# EAGLE board front-panel-revD-DEB-board2 (EAGLE 5.11)
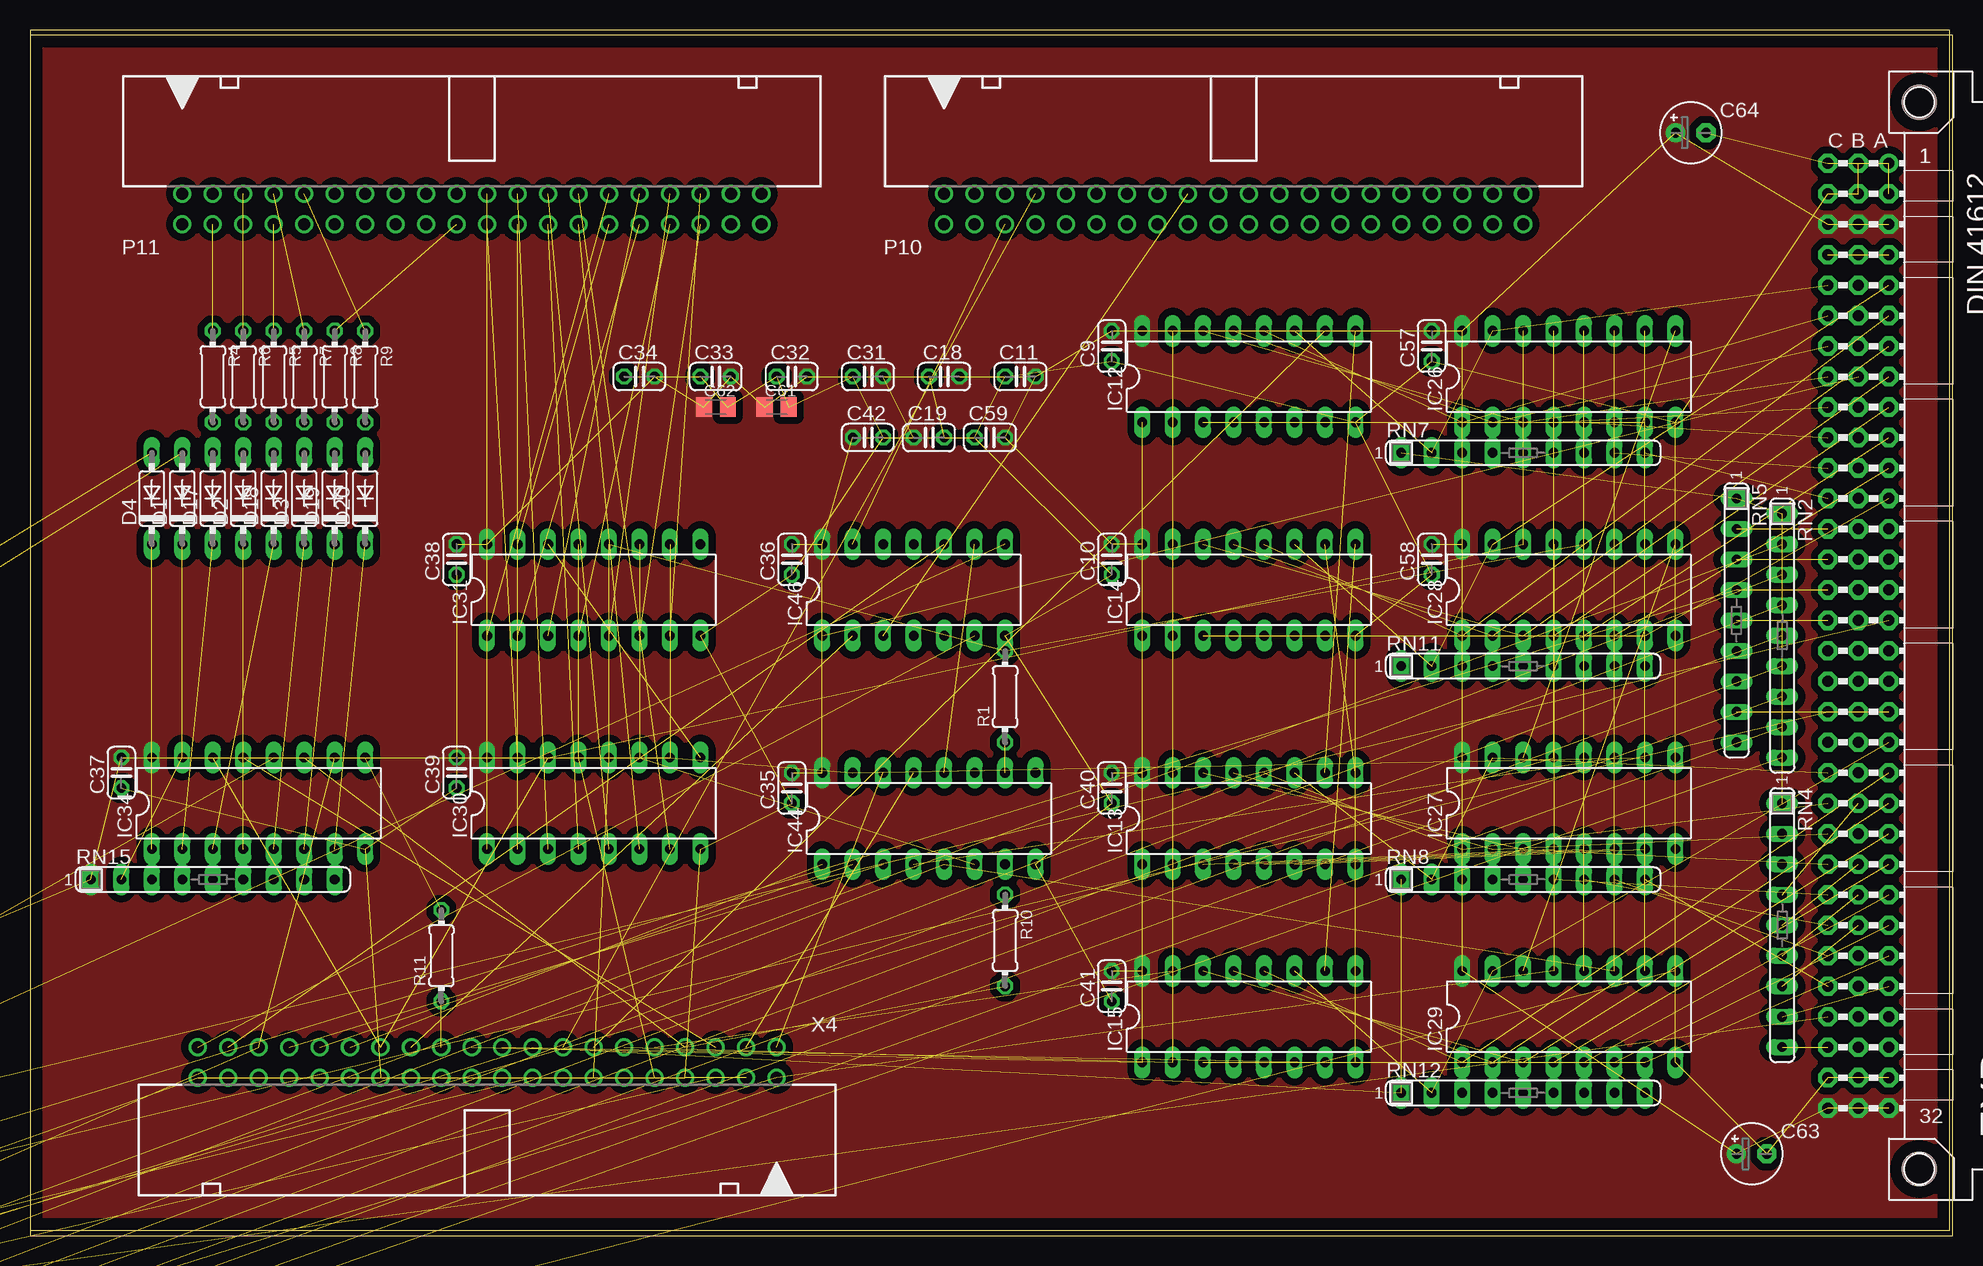
[diagram p0: board, top side]
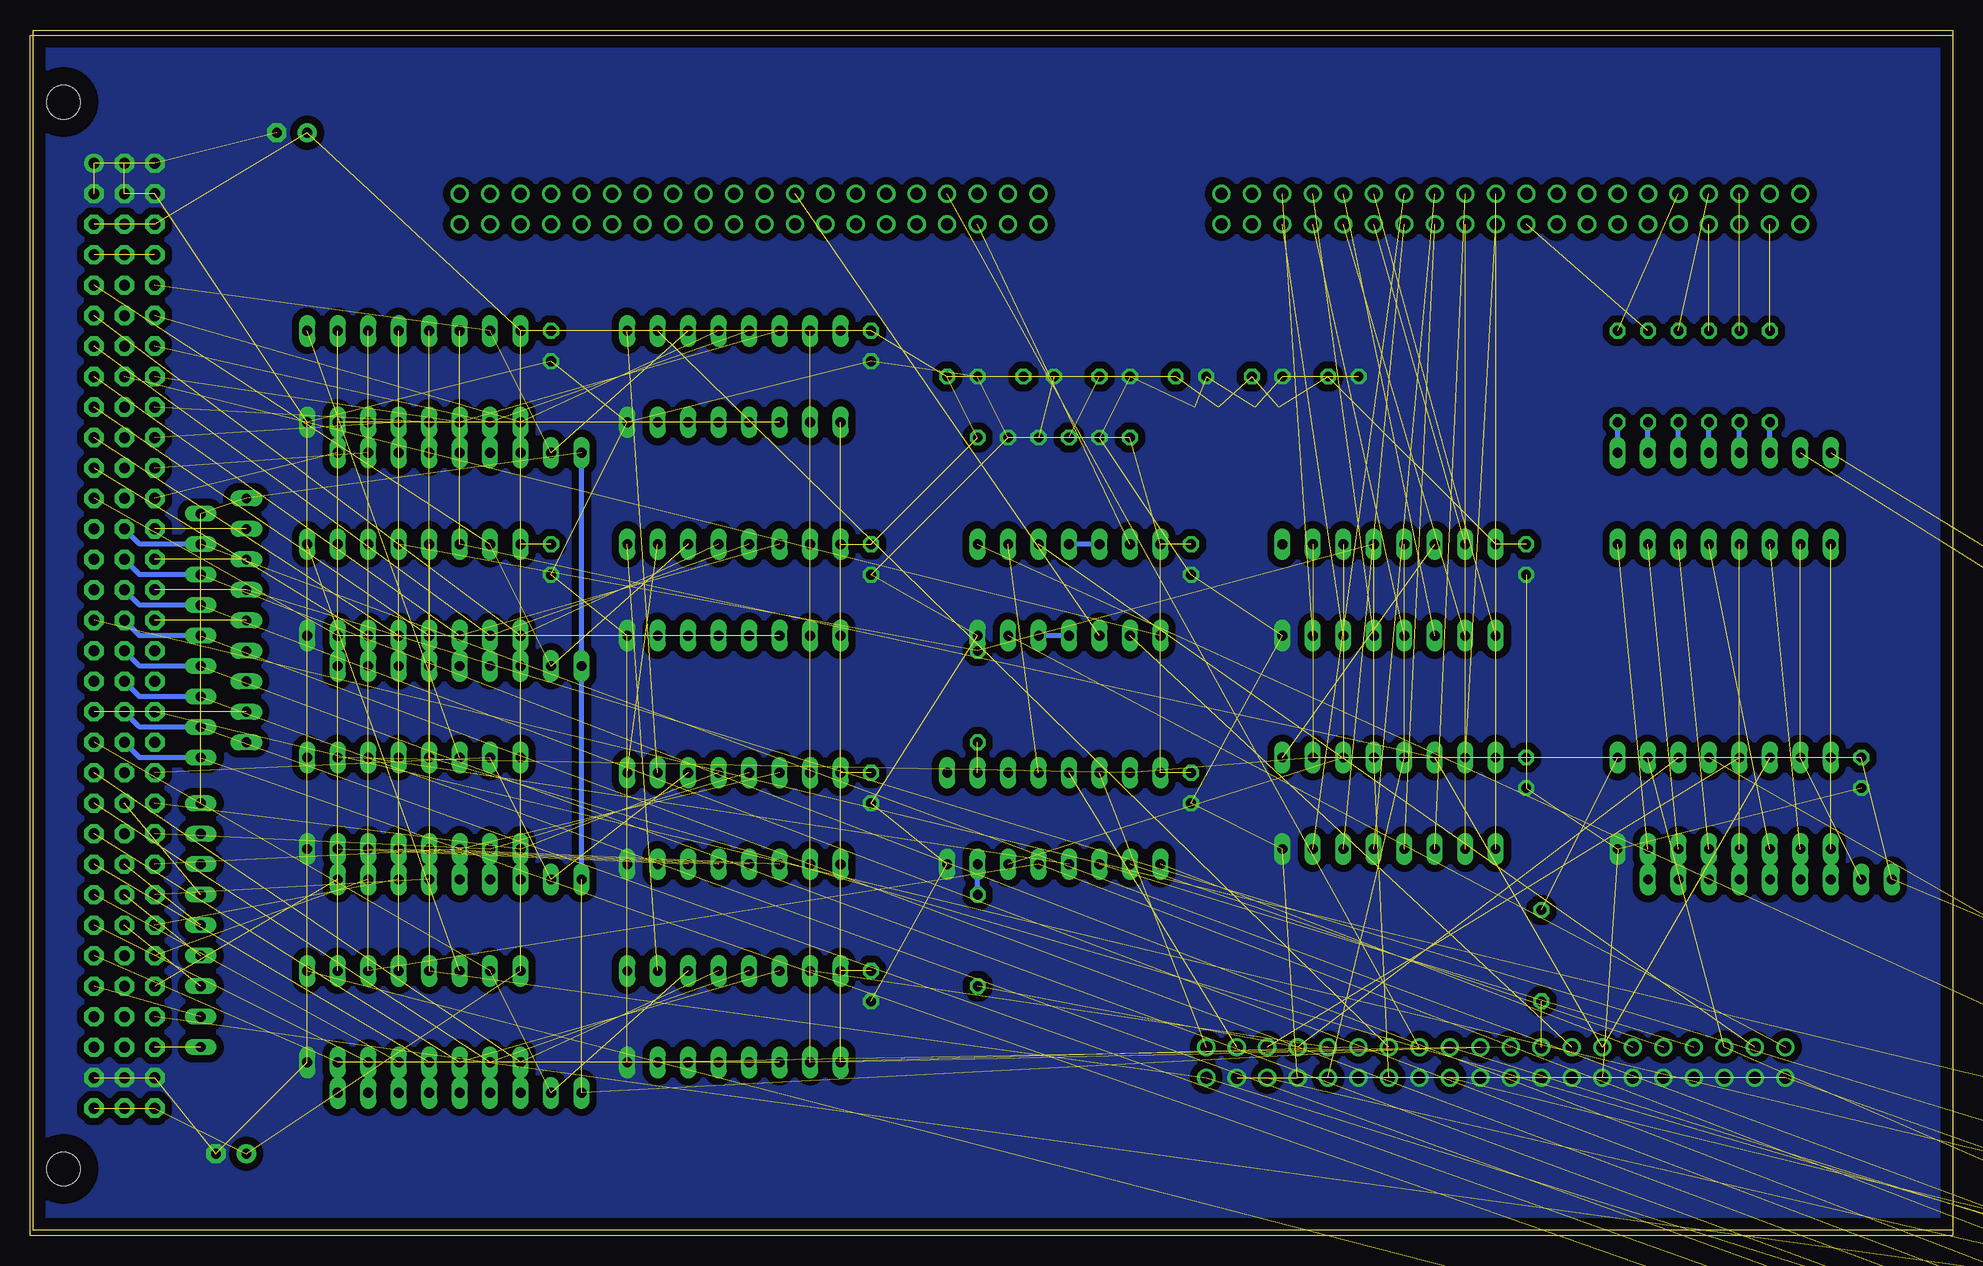
[diagram p1: board, bottom side, seen from below]

Size 160 x 100 mm. Coordinates in mm from the lower left corner, seen from the top.
Outline: 0,0 160,0 160,100 0,100 0,0
Copper layers (1*16): Top 0.035mm / dielectric 1.5mm / Bottom 0.035mm
Design rules "default": minimum track width 10mil, minimum drill 24mil, track to track 8mil, track to pad 8mil, pad to pad 8mil, via to via 8mil, smd to smd 8mil, copper to edge 40mil, drill to drill 8mil, minimum pad ring 10mil, minimum via ring 8mil, stop-mask expansion 4mil, vias tented up to drill 0mil, thermal gap 10mil
Net classes: 0 default: width 0.305 mm, clearance 0.203 mm; 1 low power: width 1.27 mm, clearance 0.254 mm; 2 Power Rail: width 0.61 mm, clearance 0.152 mm

## Footprints (pad centres in the part's own frame; a part is rotated, then mirrored left to right if it is on the bottom)
C025-024X044 = drill 0.813 octagon: 1 -1.27,0; 2 1.27,0
C0805K = smd 1.3 x 1.6: 1 -1,0; 2 1,0
E2,5-5 = drill 0.813 pad 1.6 round: + -1.27,0 | drill 0.813 pad 1.6 octagon: - 1.27,0
DO35-7 = drill 0.813 long: A 3.81,0; C -3.81,0
VG96K = drill 0.914 pad 1.6 round: A1 154.94,39.37 | drill 0.914 pad 1.6 octagon: A2 154.94,36.83; A3 154.94,34.29; A4 154.94,31.75; A5 154.94,29.21; A6 154.94,26.67; A7 154.94,24.13; A8 154.94,21.59; A9 154.94,19.05; A10 154.94,16.51; A11 154.94,13.97; A12 154.94,11.43; A13 154.94,8.89; A14 154.94,6.35; A15 154.94,3.81; A16 154.94,1.27; A17 154.94,-1.27; A18 154.94,-3.81; A19 154.94,-6.35; A20 154.94,-8.89; A21 154.94,-11.43; A22 154.94,-13.97; A23 154.94,-16.51; A24 154.94,-19.05; A25 154.94,-21.59; A26 154.94,-24.13; A27 154.94,-26.67; A28 154.94,-29.21; A29 154.94,-31.75; A30 154.94,-34.29; A31 154.94,-36.83; A32 154.94,-39.37; B1 152.4,39.37; B2 152.4,36.83; B3 152.4,34.29; B4 152.4,31.75; B5 152.4,29.21; B6 152.4,26.67; B7 152.4,24.13; B8 152.4,21.59; B9 152.4,19.05; B10 152.4,16.51; B11 152.4,13.97; B12 152.4,11.43; B13 152.4,8.89; B14 152.4,6.35; B15 152.4,3.81; B16 152.4,1.27; B17 152.4,-1.27; B18 152.4,-3.81; B19 152.4,-6.35; B20 152.4,-8.89; B21 152.4,-11.43; B22 152.4,-13.97; B23 152.4,-16.51; B24 152.4,-19.05; B25 152.4,-21.59; B26 152.4,-24.13; B27 152.4,-26.67; B28 152.4,-29.21; B29 152.4,-31.75; B30 152.4,-34.29; B31 152.4,-36.83; B32 152.4,-39.37; C1 149.86,39.37; C2 149.86,36.83; C3 149.86,34.29; C4 149.86,31.75; C5 149.86,29.21; C6 149.86,26.67; C7 149.86,24.13; C8 149.86,21.59; C9 149.86,19.05; C10 149.86,16.51; C11 149.86,13.97; C12 149.86,11.43; C13 149.86,8.89; C14 149.86,6.35; C15 149.86,3.81; C16 149.86,1.27; C17 149.86,-1.27; C18 149.86,-3.81; C19 149.86,-6.35; C20 149.86,-8.89; C21 149.86,-11.43; C22 149.86,-13.97; C23 149.86,-16.51; C24 149.86,-19.05; C25 149.86,-21.59; C26 149.86,-24.13; C27 149.86,-26.67; C28 149.86,-29.21; C29 149.86,-31.75; C30 149.86,-34.29; C31 149.86,-36.83; C32 149.86,-39.37 | hole 2.794: 157.48,44.45; 157.48,-44.45
DIL16 = drill 0.813 long: 1 -8.89,-3.81; 2 -6.35,-3.81; 3 -3.81,-3.81; 4 -1.27,-3.81; 5 1.27,-3.81; 6 3.81,-3.81; 7 6.35,-3.81; 8 8.89,-3.81; 9 8.89,3.81; 10 6.35,3.81; 11 3.81,3.81; 12 1.27,3.81; 13 -1.27,3.81; 14 -3.81,3.81; 15 -6.35,3.81; 16 -8.89,3.81
DIL14 = drill 0.813 long: 1 -7.62,-3.81; 2 -5.08,-3.81; 3 -2.54,-3.81; 4 0,-3.81; 5 2.54,-3.81; 6 5.08,-3.81; 7 7.62,-3.81; 8 7.62,3.81; 9 5.08,3.81; 10 2.54,3.81; 11 0,3.81; 12 -2.54,3.81; 13 -5.08,3.81; 14 -7.62,3.81
JP2 = drill 0.914 long: 1 -2.54,0; 2 0,0; 3 2.54,0
PAK100/2500-5-40 = drill 1 pad 1.422 round: 1 -24.13,-1.27; 2 -24.13,1.27; 3 -21.59,-1.27; 4 -21.59,1.27; 5 -19.05,-1.27; 6 -19.05,1.27; 7 -16.51,-1.27; 8 -16.51,1.27; 9 -13.97,-1.27; 10 -13.97,1.27; 11 -11.43,-1.27; 12 -11.43,1.27; 13 -8.89,-1.27; 14 -8.89,1.27; 15 -6.35,-1.27; 16 -6.35,1.27; 17 -3.81,-1.27; 18 -3.81,1.27; 19 -1.27,-1.27; 20 -1.27,1.27; 21 1.27,-1.27; 22 1.27,1.27; 23 3.81,-1.27; 24 3.81,1.27; 25 6.35,-1.27; 26 6.35,1.27; 27 8.89,-1.27; 28 8.89,1.27; 29 11.43,-1.27; 30 11.43,1.27; 31 13.97,-1.27; 32 13.97,1.27; 33 16.51,-1.27; 34 16.51,1.27; 35 19.05,-1.27; 36 19.05,1.27; 37 21.59,-1.27; 38 21.59,1.27; 39 24.13,-1.27; 40 24.13,1.27
0204/7 = drill 0.813 octagon: 1 -3.81,0; 2 3.81,0
SIL9 = drill 0.813 long: 1 -10.16,0; 2 -7.62,0; 3 -5.08,0; 4 -2.54,0; 5 0,0; 6 2.54,0; 7 5.08,0; 8 7.62,0; 9 10.16,0
STANDOFF_28_60 = hole 3.302: 0,0

## Placement (x,y rotation side)
$4_37_$  SIGNATURESILK  [SIGNATURE]  -88.9,172.72 0 top  (outside the outline)
$4_39_$  OSHW-LOGOL  [OSHW-LOGO-L]  -123.19,173.99 0 top  (outside the outline)
$4_40_$  QRCODE-CFT  [CFT-QRCODE]  -31.75,139.7 0 top  (outside the outline)
C9  0.1uF  [C025-024X044]  90.17,73.66 90 top
C10  0.1uF  [C025-024X044]  90.17,55.88 90 top
C11  0.1uF  [C025-024X044]  82.55,71.12 0 top
C18  0.1uF  [C025-024X044]  76.2,71.12 0 top
C19  1uF  [C025-024X044]  74.93,66.04 0 top
C31  0.1uF  [C025-024X044]  69.85,71.12 0 top
C32  0.1uF  [C025-024X044]  63.5,71.12 0 top
C33  0.1uF  [C025-024X044]  57.15,71.12 0 top
C34  0.1uF  [C025-024X044]  50.8,71.12 0 top
C35  0.1uF  [C025-024X044]  63.5,36.83 90 top
C36  0.1uF  [C025-024X044]  63.5,55.88 90 top
C37  0.1uF  [C025-024X044]  7.62,38.1 90 top
C38  0.1uF  [C025-024X044]  35.56,55.88 90 top
C39  0.1uF  [C025-024X044]  35.56,38.1 90 top
C40  0.1uF  [C025-024X044]  90.17,36.83 90 top
C41  0.1uF  [C025-024X044]  90.17,20.32 90 top
C42  1uF  [C025-024X044]  69.85,66.04 0 top
C57  0.1uF  [C025-024X044]  116.84,73.66 90 top
C58  0.1uF  [C025-024X044]  116.84,55.88 90 top
C59  0.1uF  [C025-024X044]  80.01,66.04 0 top
C61  1uF  [C0805K]  62.23,68.58 0 top
C62  1uF  [C0805K]  57.15,68.58 0 top
C63  47uF  [E2,5-5]  143.51,6.35 0 top
C64  47uF  [E2,5-5]  138.43,91.44 0 top
D1  1N4148  [DO35-7]  12.7,60.96 90 top
D2  1N4148  [DO35-7]  17.78,60.96 90 top
D3  1N4148  [DO35-7]  22.86,60.96 90 top
D4  1N4148  [DO35-7]  10.16,60.96 90 top
D5  1N4148  [DO35-7]  -144.78,-44.45 0 top  (outside the outline)
D17  1N4148  [DO35-7]  15.24,60.96 90 top
D18  1N4148  [DO35-7]  20.32,60.96 90 top
D19  1N4148  [DO35-7]  25.4,60.96 90 top
D20  1N4148  [DO35-7]  27.94,60.96 90 top
EXP  [VG96K]  0,49.53 0 top
IC1  74HC251N  [DIL16]  -138.43,-34.29 0 top  (outside the outline)
IC2  74HC595N  [DIL16]  -138.43,-54.61 0 top  (outside the outline)
IC12  74HC165N  [DIL16]  101.6,71.12 0 top
IC13  74HC165N  [DIL16]  101.6,34.29 0 top
IC14  74HC165N  [DIL16]  101.6,53.34 0 top
IC15  74HC165N  [DIL16]  101.6,17.78 0 top
IC26  74HC595N  [DIL16]  128.27,71.12 0 top
IC27  74HC595N  [DIL16]  128.27,35.56 0 top
IC28  74HC595N  [DIL16]  128.27,53.34 0 top
IC29  74HC595N  [DIL16]  128.27,17.78 0 top
IC30  74HC595N  [DIL16]  46.99,35.56 0 top
IC31  74HC595N  [DIL16]  46.99,53.34 0 top
IC34  74HC595N  [DIL16]  19.05,35.56 0 top
IC44  74HC259N  [DIL16]  74.93,34.29 0 top
IC46  74HC04N  [DIL14]  73.66,53.34 0 top
JP1  [JP2]  -147.32,-22.86 0 top  (outside the outline)
P10  2540-5  [PAK100/2500-5-40]  100.33,85.09 0 top
P11  2540-5  [PAK100/2500-5-40]  36.83,85.09 0 top
R1  30R  [0204/7]  81.28,44.45 90 top
R2  30R  [0204/7]  -137.16,-22.86 0 top  (outside the outline)
R3  30R  [0204/7]  -137.16,-26.67 0 top  (outside the outline)
R4  30R  [0204/7]  15.24,71.12 270 top
R5  30R  [0204/7]  20.32,71.12 270 top
R6  30R  [0204/7]  17.78,71.12 270 top
R7  30R  [0204/7]  22.86,71.12 270 top
R8  30R  [0204/7]  25.4,71.12 270 top
R9  30R  [0204/7]  27.94,71.12 270 top
R10  30R  [0204/7]  81.28,24.13 270 top
R11  30R  [0204/7]  34.29,22.86 90 top
RN2  4k7  [SIL9]  146.05,49.53 270 top
RN4  4k7  [SIL9]  146.05,25.4 270 top
RN5  4k7  [SIL9]  142.24,50.8 270 top
RN7  4k7  [SIL9]  124.46,64.77 0 top
RN8  4k7  [SIL9]  124.46,29.21 0 top
RN11  4k7  [SIL9]  124.46,46.99 0 top
RN12  4k7  [SIL9]  124.46,11.43 0 top
RN15  4k7  [SIL9]  15.24,29.21 0 top
U1  HOLE  [STANDOFF_28_60]  -120.65,187.96 0 top  (outside the outline)
U2  HOLE  [STANDOFF_28_60]  -127,187.96 0 top  (outside the outline)
U3  HOLE  [STANDOFF_28_60]  -133.35,187.96 0 top  (outside the outline)
U4  HOLE  [STANDOFF_28_60]  -139.7,187.96 0 top  (outside the outline)
X4  2540-5  [PAK100/2500-5-40]  38.1,13.97 180 top

## Library data of the parts
$4_37_$ $4_40_$ D1-D5 D17-D20 IC1 IC2 IC12-IC15 IC26-IC31 IC34 IC44 IC46 U1-U4 = alexios
$4_39_$ = SparkFun
C9-C11 C18 C19 C31-C42 C57-C59 C61-C64 = rcl
EXP = alexios-19inch
JP1 = jumper
P10 P11 X4 = con-3m; OC_FARNELL: 9838414; OC_NEWARK: unknown
R1-R11 = resistor
RN2 RN4 RN5 RN7 RN8 RN11 RN12 RN15 = resistor-sil; OC_FARNELL: unknown; OC_NEWARK: unknown

## Nets
![R1]: EXP.B9
![R6]: EXP.B10
![R7]: EXP.B11
![W1]: EXP.B12
!AB-OE: IC2.13 IC28.13 IC29.13 X4.2
!CB-ACCPL: P10.39
!CB-AINDEX: P11.20
!CB-CLI: P10.17
!CB-CLL: P10.1
!CB-CPL: P10.2
!CB-DEC: P10.40
!CB-END: P10.10
!CB-INCPC: P11.3 R4.1
!CB-RAC: P11.4
!CB-RAGL: P10.3
!CB-RDR: P11.5
!CB-RPC: P11.6 R6.1
!CB-SKIP: P10.15
!CB-STI: P10.16
!CB-STPAC: P11.1
!CB-STPDR: P11.2
!CB-WAC: P11.7 R5.1
!CB-WALU: P10.4
!CB-WAR: P11.8 R7.1
!CB-WDR: P11.9
!CB-WEN: P10.8 X4.15
!CB-WIR: P11.19 R8.1
!CB-WPC: P11.10 R9.1
!CLR: IC2.10 IC26.10 IC27.10 IC28.10 IC29.10 IC30.10 IC31.10 IC34.10 IC44.15 X4.35
!CTL-OE: IC34.13 X4.5
!DB-OE: IC1.9 X4.6
!DB-OE-COMBINED: IC1.5 IC26.13 IC27.13
!DEBEN: IC12.2 IC13.2 IC14.2 IC15.2 X4.11
!ENDEXT: EXP.B7
!HALT: EXP.A19 RN5.8
!IBUS-OE: IC30.13 IC31.13 X4.10
!IO: EXP.C14 RN5.3
!IODEV1XX: EXP.B24 RN4.5
!IODEV2XX: EXP.B25 RN4.6
!IODEV3XX: EXP.B26 RN4.7
!IRQ: EXP.C29 JP1.3
!IRQ0: EXP.C18
!IRQ1: EXP.C19 R3.1
!IRQ2: EXP.C20
!IRQ3: EXP.A13
!IRQ4: EXP.A14
!IRQ5: EXP.A15
!IRQ6: EXP.A16 JP1.1
!IRQ7: EXP.A18
!IRQS: EXP.A30
!MEM: EXP.C13 RN5.2
!PFP-SEL: IC1.11 X4.18
!R: EXP.C15 IC1.10 RN5.4
!RESET: EXP.C30 RN4.9
!RSTHOLD: EXP.B22 RN4.4
!SAMPLE: IC12.1 IC13.1 IC14.1 IC15.1 X4.21
!SKIPEXT: EXP.B6
!SYSDEV: EXP.A28 RN4.8
!T34: EXP.B27
!W: EXP.C16 RN5.5
!WS: EXP.B8 IC46.1
*TPA: EXP.A17
*TPC: EXP.C17
+3.3V [Power Rail]: EXP.A4 EXP.B4 EXP.C4
AB0: EXP.A5 IC14.11 IC28.15 RN11.2
AB1: EXP.A6 IC14.12 IC28.1 RN11.3
AB2: EXP.A7 IC14.13 IC28.2 RN11.4
AB3: EXP.A8 IC14.14 IC28.3 RN11.5
AB4: EXP.A9 IC14.3 IC28.4 RN11.6
AB5: EXP.A10 IC14.4 IC28.5 RN11.7
AB6: EXP.A11 IC14.5 IC28.6 RN11.8
AB7: EXP.A12 IC14.6 IC28.7 RN11.9
AB8: EXP.A20 IC15.11 IC29.15 RN12.2
AB9: EXP.A21 IC15.12 IC29.1 RN12.3
AB10: EXP.A22 IC15.13 IC29.2 RN12.4
AB11: EXP.A23 IC15.14 IC29.3 RN12.5
AB12: EXP.A24 IC15.3 IC29.4 RN12.6
AB13: EXP.A25 IC15.4 IC29.5 RN12.7
AB14: EXP.A26 IC15.5 IC29.6 RN12.8
AB15: EXP.A27 IC15.6 IC29.7 RN12.9
ABCLK: IC2.11 IC28.11 IC29.11 IC44.5
AEXT0: EXP.B13 IC2.15 RN2.2
AEXT1: EXP.B14 IC2.1 RN2.3
AEXT2: EXP.B15 IC2.2 RN2.4
AEXT3: EXP.B16 IC2.3 RN2.5
AEXT4: EXP.B17 IC2.4 RN2.6
AEXT5: EXP.B18 IC2.5 RN2.7
AEXT6: EXP.B19 IC2.6 RN2.8
AEXT7: EXP.B20 IC2.7 RN2.9
BUSPU: D5.C RN2.1 RN4.1 RN5.1 RN7.1 RN8.1 RN11.1 RN12.1 X4.17
CB-AC0: P10.23
CB-AC1: P10.24
CB-AC2: P10.25
CB-AC3: P10.26
CB-AC4: P10.27
CB-AC5: P10.28
CB-AC6: P10.29
CB-AC7: P10.30
CB-AC8: P10.31
CB-AC9: P10.32
CB-AC10: P10.33
CB-AC11: P10.34
CB-AC12: P10.35
CB-AC13: P10.36
CB-AC14: P10.37
CB-AC15: P10.38
CB-FL: IC46.13 P10.5
CB-FNEG: P11.11
CB-FV: P10.6
CB-FZERO: P11.12
CB-IR0: P10.7
CB-IR2: P10.9
CB-IR11: P10.22
CB-IR12: P11.37
CB-IR13: P11.38
CB-IR14: P11.39
CB-IR15: P11.40
CB-OPIF0: IC46.3 P10.18
CB-OPIF1: P10.19
CB-OPIF2: P10.20
CB-OPIF3: P10.21
CB-PC10: P11.13
CB-PC11: P11.14
CB-PC12: P11.15
CB-PC13: P11.16
CB-PC14: P11.17
CB-PC15: P11.18
CB-RUNIT0: P10.11
CB-RUNIT1: P10.12
CB-RUNIT2: P10.13
CB-RUNIT3: P10.14
CLK1: EXP.A29
CLK2: EXP.B29
CLK3: EXP.B30
CLK4: EXP.B28
CMD1: IC44.14 X4.1
COUT: IC44.13 X4.3
CTLCLK: IC34.11 R10.2 X4.7
DB0: EXP.C5 IC12.11 IC26.15 RN7.2
DB1: EXP.C6 IC12.12 IC26.1 RN7.3
DB2: EXP.C7 IC12.13 IC26.2 RN7.4
DB3: EXP.C8 IC12.14 IC26.3 RN7.5
DB4: EXP.C9 IC12.3 IC26.4 RN7.6
DB5: EXP.C10 IC12.4 IC26.5 RN7.7
DB6: EXP.C11 IC12.5 IC26.6 RN7.8
DB7: EXP.C12 IC12.6 IC26.7 RN7.9
DB8: EXP.C21 IC13.11 IC27.15 RN8.2
DB9: EXP.C22 IC13.12 IC27.1 RN8.3
DB10: EXP.C23 IC13.13 IC27.2 RN8.4
DB11: EXP.C24 IC13.14 IC27.3 RN8.5
DB12: EXP.C25 IC13.3 IC27.4 RN8.6
DB13: EXP.C26 IC13.4 IC27.5 RN8.7
DB14: EXP.C27 IC13.5 IC27.6 RN8.8
DB15: EXP.C28 IC13.6 IC27.7 RN8.9
DBCLK: IC26.11 IC27.11 IC44.4
DEB-CASCADE: IC12.10 X4.13
DEB-OUT: IC15.7 X4.19
DOUT: IC26.14 IC28.14 IC30.14 IC34.14 X4.27
FPFL: IC46.10 X4.37
FPOPIF0: IC46.6 X4.39
FPWS: IC46.2 X4.25
GND [low power]: C9.1 C10.1 C11.1 C18.1 C19.2 C31.1 C32.1 C33.1 C34.1 C35.1 C36.1 C37.1 C38.1 C39.1 C40.1 C41.1 C42.2 C57.1 C58.1 C59.1 C61.2 C62.2 C63.- C64.- EXP.A1 EXP.A2 EXP.A31 EXP.B1 EXP.B2 EXP.B31 EXP.C1 EXP.C2 EXP.C31 IC1.2 IC1.3 IC1.4 IC1.7 IC1.8 IC1.13 IC1.15 IC2.8 IC12.8 IC13.8 IC14.8 IC15.8 IC26.8 IC27.8 IC28.8 IC29.8 IC30.8 IC31.8 IC34.8 IC44.8 IC46.7 X4.4 X4.8 X4.12 X4.16 X4.20 X4.22 X4.24 X4.26 X4.28 X4.30 X4.32 X4.34 X4.36 X4.38 X4.40
IBUS0: IC30.15 P11.21
IBUS1: IC30.1 P11.22
IBUS2: IC30.2 P11.23
IBUS3: IC30.3 P11.24
IBUS4: IC30.4 P11.25
IBUS5: IC30.5 P11.26
IBUS6: IC30.6 P11.27
IBUS7: IC30.7 P11.28
IBUS8: IC31.15 P11.29
IBUS9: IC31.1 P11.30
IBUS10: IC31.2 P11.31
IBUS11: IC31.3 P11.32
IBUS12: IC31.4 P11.33
IBUS13: IC31.5 P11.34
IBUS14: IC31.6 P11.35
IBUS15: IC31.7 P11.36
IBUSCLK: IC30.11 IC31.11 IC44.6
ICLK: IC12.15 IC13.15 IC14.15 IC15.15 X4.9
IOADDR0: IC44.1 X4.29
IOADDR1: IC44.2 X4.31
IOADDR2: IC44.3 X4.33
N$1: D1.C IC34.15 RN15.2
N$2: D2.C IC34.4 RN15.6
N$3: D3.C IC34.5 RN15.7
N$4: D4.C IC34.1 RN15.3
N$5: D4.A R2.2
N$6: D1.A R3.2
N$7: D17.A R4.2
N$8: D18.A R5.2
N$9: D2.A R6.2
N$10: D3.A R7.2
N$11: D19.A R8.2
N$12: D20.A R9.2
N$13: IC44.7 R10.1
N$14: IC34.9 R11.2
N$15: JP1.2 R2.1
N$16: IC44.12 IC46.9
N$17: D5.A IC46.8
N$18: IC44.10 R1.1
N$19: IC2.14 IC29.9
N$38: IC46.11 IC46.12
N$43: IC46.4 IC46.5
N$111: IC26.9 IC27.14
N$112: IC28.9 IC29.14
N$113: IC30.9 IC31.14
N$126: IC13.9 IC14.10
N$127: IC12.9 IC13.10
N$129: IC14.9 IC15.10
N$155: D17.C IC34.2 RN15.4
N$157: D18.C IC34.3 RN15.5
N$160: D19.C IC34.6 RN15.8
N$161: D20.C IC34.7 RN15.9
SEROUT: R11.1 X4.23
STCP: IC2.12 IC26.12 IC27.12 IC28.12 IC29.12 IC30.12 IC31.12 IC34.12 R1.2 X4.14
VCC [low power]: C9.2 C10.2 C11.2 C18.2 C19.1 C31.2 C32.2 C33.2 C34.2 C35.2 C36.2 C37.2 C38.2 C39.2 C40.2 C41.2 C42.1 C57.2 C58.2 C59.2 C61.1 C62.1 C63.+ C64.+ EXP.A3 EXP.A32 EXP.B3 EXP.B32 EXP.C3 EXP.C32 IC1.1 IC1.12 IC1.14 IC1.16 IC2.16 IC12.16 IC13.16 IC14.16 IC15.16 IC26.16 IC27.16 IC28.16 IC29.16 IC30.16 IC31.16 IC34.16 IC44.16 IC46.14 RN15.1

## Tracks (layer width: path | path; a pad name or v marks a point on that pad's centre or on a via)
!AB-OE  (3 unrouted)
!CB-INCPC  (1 unrouted)
!CB-RPC  (1 unrouted)
!CB-WAC  (1 unrouted)
!CB-WAR  (1 unrouted)
!CB-WEN  (1 unrouted)
!CB-WIR  (1 unrouted)
!CB-WPC  (1 unrouted)
!CLR  (9 unrouted)
!CTL-OE  (1 unrouted)
!DB-OE  (1 unrouted)
!DB-OE-COMBINED  (2 unrouted)
!DEBEN  (4 unrouted)
!HALT  (1 unrouted)
!IBUS-OE  (2 unrouted)
!IO  (1 unrouted)
!IODEV1XX  (1 unrouted)
!IODEV2XX  (1 unrouted)
!IODEV3XX  (1 unrouted)
!IRQ  (1 unrouted)
!IRQ1  (1 unrouted)
!IRQ6  (1 unrouted)
!MEM  (1 unrouted)
!PFP-SEL  (1 unrouted)
!R  (2 unrouted)
!RESET  (1 unrouted)
!RSTHOLD  (1 unrouted)
!SAMPLE  (4 unrouted)
!SYSDEV  (1 unrouted)
!W  (1 unrouted)
!WS  (1 unrouted)
+3.3V  (2 unrouted)
AB0  (3 unrouted)
AB1  (2 unrouted)
  Bottom 0.406: RN11.3 IC28.1
AB2  (2 unrouted)
  Bottom 0.406: RN11.4 IC28.2
AB3  (2 unrouted)
  Bottom 0.406: RN11.5 IC28.3
AB4  (2 unrouted)
  Bottom 0.406: RN11.6 IC28.4
AB5  (2 unrouted)
  Bottom 0.406: RN11.7 IC28.5
AB6  (2 unrouted)
  Bottom 0.406: RN11.8 IC28.6
AB7  (2 unrouted)
  Bottom 0.406: RN11.9 IC28.7
AB8  (3 unrouted)
AB9  (2 unrouted)
  Bottom 0.406: RN12.3 IC29.1
AB10  (2 unrouted)
  Bottom 0.406: RN12.4 IC29.2
AB11  (2 unrouted)
  Bottom 0.406: RN12.5 IC29.3
AB12  (2 unrouted)
  Bottom 0.406: RN12.6 IC29.4
AB13  (2 unrouted)
  Bottom 0.406: RN12.7 IC29.5
AB14  (2 unrouted)
  Bottom 0.406: RN12.8 IC29.6
AB15  (2 unrouted)
  Bottom 0.406: RN12.9 IC29.7
ABCLK  (3 unrouted)
AEXT0  (1 unrouted)
  Bottom 0.406: RN2.2 151.13,57.15 EXP.B13
AEXT1  (1 unrouted)
  Bottom 0.406: RN2.3 151.13,54.61 EXP.B14
AEXT2  (1 unrouted)
  Bottom 0.406: RN2.4 151.13,52.07 EXP.B15
AEXT3  (1 unrouted)
  Bottom 0.406: RN2.5 151.13,49.53 EXP.B16
AEXT4  (1 unrouted)
  Bottom 0.406: RN2.6 151.13,46.99 EXP.B17
AEXT5  (1 unrouted)
  Bottom 0.406: RN2.7 151.13,44.45 EXP.B18
AEXT6  (1 unrouted)
  Bottom 0.406: RN2.8 151.13,41.91 EXP.B19
AEXT7  (1 unrouted)
  Bottom 0.406: RN2.9 151.13,39.37 EXP.B20
BUSPU  (6 unrouted)
  Bottom 0.406: RN7.1 RN11.1 RN8.1
CB-FL  (1 unrouted)
CB-OPIF0  (1 unrouted)
CMD1  (1 unrouted)
COUT  (1 unrouted)
CTLCLK  (2 unrouted)
DB0  (3 unrouted)
DB1  (2 unrouted)
  Bottom 0.406: RN7.3 IC26.1
DB2  (2 unrouted)
  Bottom 0.406: RN7.4 IC26.2
DB3  (2 unrouted)
  Bottom 0.406: RN7.5 IC26.3
DB4  (2 unrouted)
  Bottom 0.406: RN7.6 IC26.4
DB5  (2 unrouted)
  Bottom 0.406: RN7.7 IC26.5
DB6  (2 unrouted)
  Bottom 0.406: RN7.8 IC26.6
DB7  (2 unrouted)
  Bottom 0.406: RN7.9 IC26.7
DB8  (3 unrouted)
DB9  (2 unrouted)
  Bottom 0.406: RN8.3 IC27.1
DB10  (2 unrouted)
  Bottom 0.406: RN8.4 IC27.2
DB11  (2 unrouted)
  Bottom 0.406: RN8.5 IC27.3
DB12  (2 unrouted)
  Bottom 0.406: RN8.6 IC27.4
DB13  (2 unrouted)
  Bottom 0.406: RN8.7 IC27.5
DB14  (2 unrouted)
  Bottom 0.406: RN8.8 IC27.6
DB15  (2 unrouted)
  Bottom 0.406: RN8.9 IC27.7
DBCLK  (2 unrouted)
DEB-CASCADE  (1 unrouted)
DEB-OUT  (1 unrouted)
DOUT  (4 unrouted)
FPFL  (1 unrouted)
FPOPIF0  (1 unrouted)
FPWS  (1 unrouted)
GND  (68 unrouted)
  pour Bottom (isolate 0.61, rank 6, no thermals): 0,100.33 160.02,100.33 160.02,-1.27 0,-1.27
IBUS0  (1 unrouted)
IBUS1  (1 unrouted)
IBUS2  (1 unrouted)
IBUS3  (1 unrouted)
IBUS4  (1 unrouted)
IBUS5  (1 unrouted)
IBUS6  (1 unrouted)
IBUS7  (1 unrouted)
IBUS8  (1 unrouted)
IBUS9  (1 unrouted)
IBUS10  (1 unrouted)
IBUS11  (1 unrouted)
IBUS12  (1 unrouted)
IBUS13  (1 unrouted)
IBUS14  (1 unrouted)
IBUS15  (1 unrouted)
IBUSCLK  (2 unrouted)
ICLK  (4 unrouted)
IOADDR0  (1 unrouted)
IOADDR1  (1 unrouted)
IOADDR2  (1 unrouted)
N$1  (2 unrouted)
N$2  (1 unrouted)
  Bottom 0.406: RN15.6 IC34.4
N$3  (1 unrouted)
  Bottom 0.406: RN15.7 IC34.5
N$4  (1 unrouted)
  Bottom 0.406: RN15.3 IC34.1
N$5  (1 unrouted)
N$6  (1 unrouted)
N$7
  Bottom 0.406: D17.A R4.2
N$8
  Bottom 0.406: D18.A R5.2
N$9
  Bottom 0.406: D2.A R6.2
N$10
  Bottom 0.406: D3.A R7.2
N$11
  Bottom 0.406: D19.A R8.2
N$12
  Bottom 0.406: D20.A R9.2
N$13
  Bottom 0.406: R10.1 IC44.7
N$14  (1 unrouted)
N$15  (1 unrouted)
N$16  (1 unrouted)
N$17  (1 unrouted)
N$18  (1 unrouted)
N$19  (1 unrouted)
N$38
  Bottom 0.406: IC46.12 IC46.11
N$43
  Bottom 0.406: IC46.4 IC46.5
N$111  (1 unrouted)
N$112  (1 unrouted)
N$113  (1 unrouted)
N$126  (1 unrouted)
N$127  (1 unrouted)
N$129  (1 unrouted)
N$155  (1 unrouted)
  Bottom 0.406: RN15.4 IC34.2
N$157  (1 unrouted)
  Bottom 0.406: RN15.5 IC34.3
N$160  (1 unrouted)
  Bottom 0.406: RN15.8 IC34.6
N$161  (1 unrouted)
  Bottom 0.406: RN15.9 IC34.7
SEROUT  (1 unrouted)
STCP  (9 unrouted)
VCC  (48 unrouted)
  pour Top (isolate 0.61, rank 6, no thermals): 0,101.6 160.02,101.6 160.02,0 0,0